# Altium PCB Driver_Board.PcbDoc (part 3 of 3)
Units mm, origin at the board's own origin, x right, y up, seen from the top; angles counter-clockwise.
Board outline 99.79 x 84.12 mm, 4 copper layers (Top Layer, Layer 1, Layer 2, Bottom Layer), stack 0.603 mm thick; 126 components, 86 nets, 479 pads, 531 vias.
Unrouted connection lines stored in the file: 62.
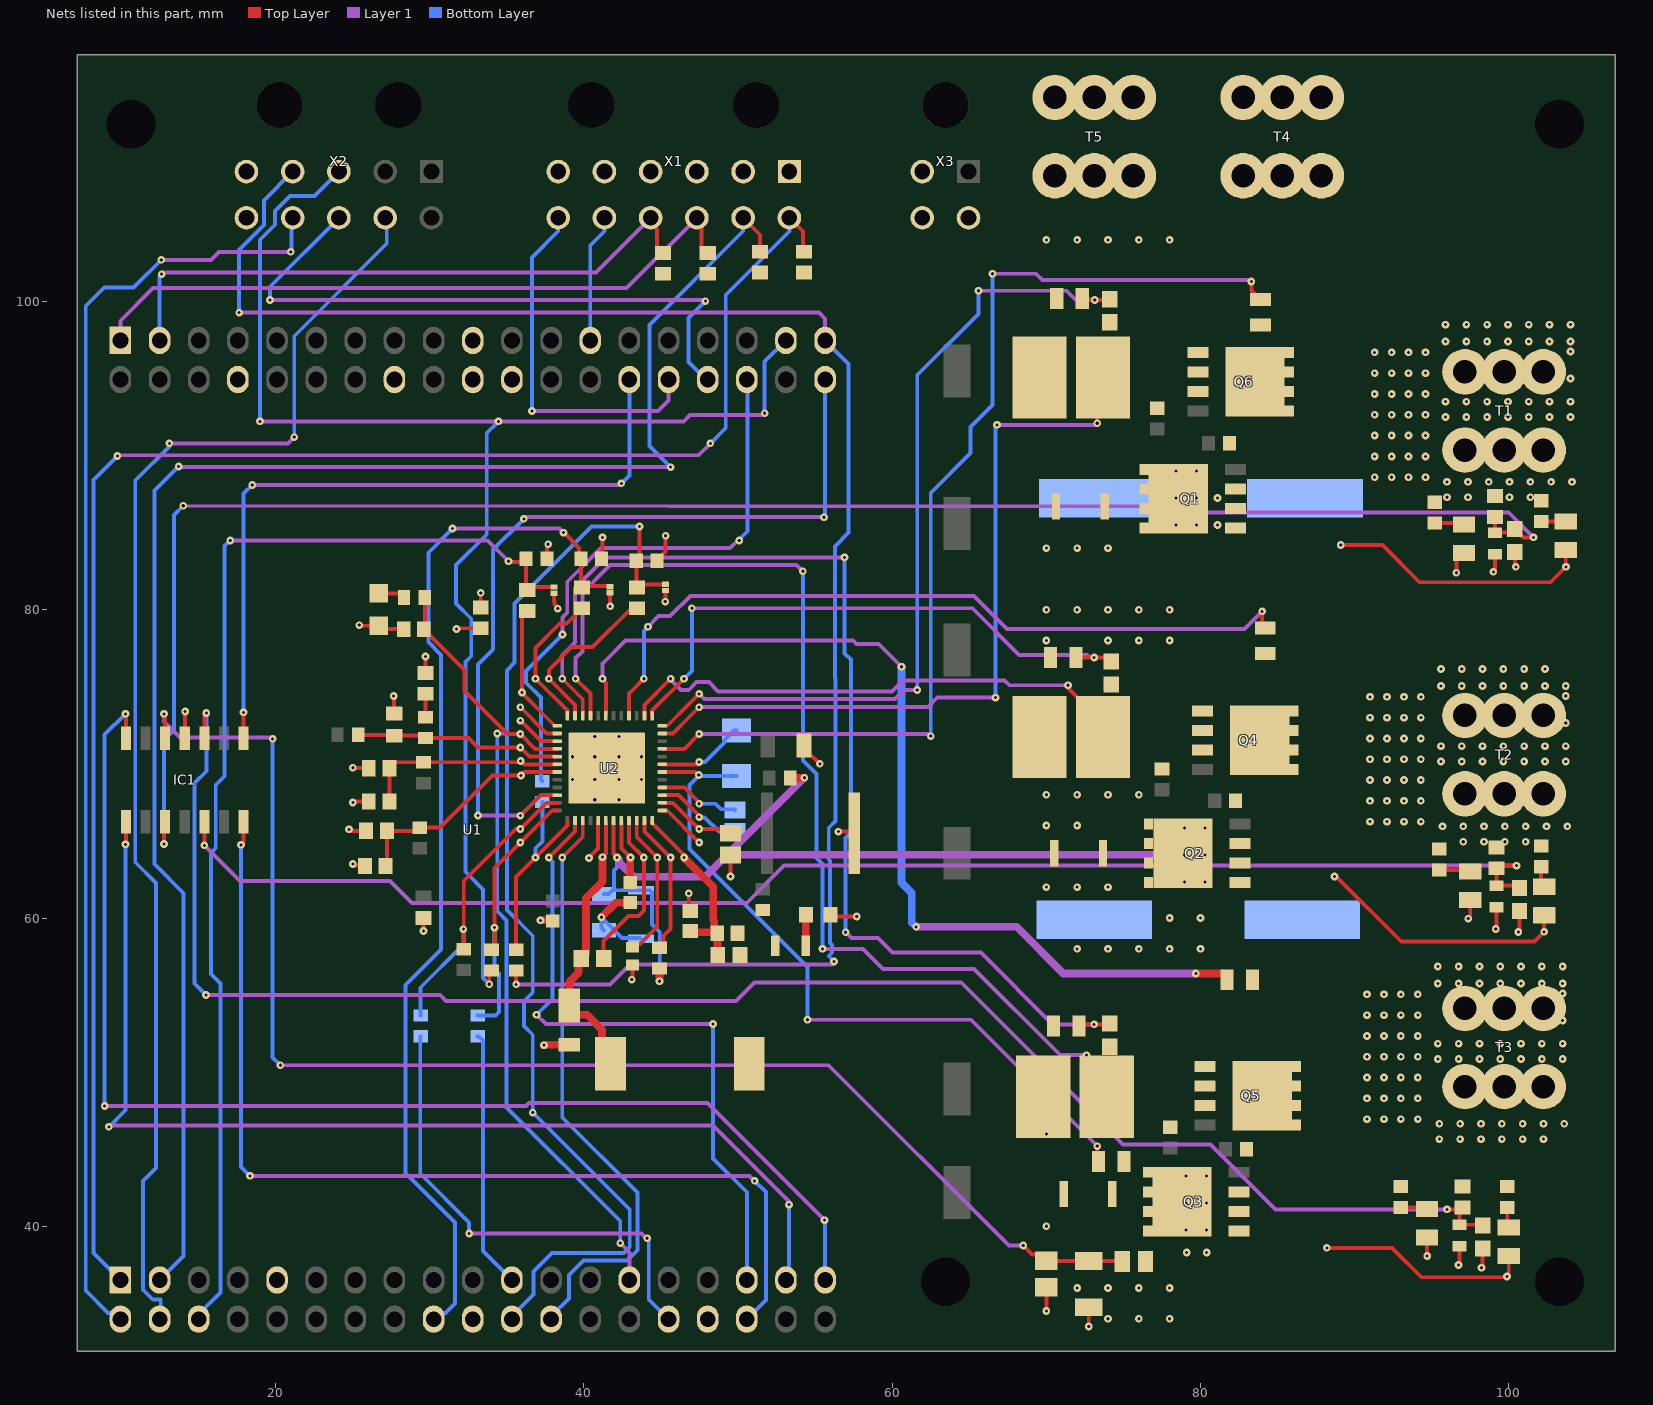
[diagram p4: the nets of this part, all layers, seen from the top]

## Via types
v1: diameter 0.5, hole 0.2, Top Layer to Bottom Layer, 531 vias

## Nets (pads, with @x,y where several pads share a name; then routed paths per layer and width w, separated by ;. In a path a pad name is that pad's centre, name@x,y a point inside that pad or via, vN(x,y) a via of type N, cw(c..) or ccw(c..) an arc to the next point about the centre after c; other vN are vias at no path point) (continued)
HALLB: R8.1 U1.18 X2.P$3 | length 97.3
  Top Layer w0.254: v1(33.852,55.703) 33.852,56.527 R8.1@33.925,56.6
  Layer 1 w0.254: v1(18.975,92.225) v1(34.45,92.225) 46.475,92.225 46.875,92.625 51.6,92.625 v1(51.725,92.75)
  Bottom Layer w0.254: v1(18.975,92.225) 18.975,104.006 19.947,104.978 19.947,105.878 20.918,106.85 22.519,106.85 X2.P$3@24.1,108.431 ; v1(33.852,55.703) 33.45,56.104 33.45,61.85 32.3,63 32.3,76.6 32.683,76.983 32.683,79.417 31.7,80.4 31.7,82.9 33.692,84.892 33.692,91.467 v1(34.45,92.225) ; v1(51.725,92.75) 51.725,96.095 U1.18@53.105,97.475
HALLC: R11.1 U1.19 X2.P$4 | length 114.2
  Top Layer w0.254: v1(35.6,55.7) R11.1@35.6,56.6
  Layer 1 w0.254: v1(17.625,99.275) 55.25,99.275 55.645,98.88 U1.19@55.645,97.475 ; v1(35.6,55.7) 41.7,55.7 42.975,56.975 56.1,56.975 56.225,57.1 v1(56.225,57.175)
  Bottom Layer w0.254: v1(17.625,99.275) 17.625,103.355 19.232,104.962 19.232,106.563 X2.P$4@21.1,108.431 ; U1.19@55.645,97.475 57.175,95.945 57.175,85 56.283,84.108 56.283,75.578 56.317,75.544 56.317,66.29 55.883,65.856 55.883,63.8 55.969,63.714 55.969,58.379 56.092,58.256 56.092,57.744 55.883,57.535 55.883,57.517 v1(56.225,57.175)
IDRIVE: R18.2 R31.2 R32.1 U2.30 | length 13.4
  Top Layer w0.254: R32.1@27.385,67.564 R31.2@27.385,69.723 27.385,69.781 27.708,70.104 R18.2@29.591,70.104 35.712,70.104 35.802,70.194 35.869,70.194 35.92,70.194 36.141,69.973 U2.30@38.271,69.973
  other v1: 35.894,70.194
INHA: U1.38 U2.34 | length 54.7
  Top Layer w0.254: v1(35.869,66.642) 37.2,67.973 U2.34@38.271,67.973
  Layer 1 w0.254: v1(33.125,66.65) 33.133,66.642 v1(35.869,66.642) ; v1(36.1,85.9) 36.217,86.017 55.558,86.017 v1(55.575,86)
  Bottom Layer w0.254: v1(33.125,66.65) 33.125,76.45 34.1,77.425 34.1,83.9 v1(36.1,85.9) ; v1(55.575,86) 55.622,86.047 55.622,86.221 55.645,86.244 U1.38@55.645,94.935
INHB: R7.1 R7.2 R8.2 U1.49 | length 34.8
  Top Layer w0.254: R8.2@34,57.95 34.2,58.15 v1(34.2,59.375) 34.2,63.233 v1(35.869,64.902) 37.94,66.973 38.271,66.973
  Bottom Layer w0.254: R7.1@33.1,52.325 33.175,52.325 33.448,52.052 33.448,38.392 U1.49@35.325,36.515 ; R7.2@33.1,53.675 34.25,53.675 34.489,53.914 34.489,56.392 34.2,56.681 v1(34.2,59.375)
INHC: U1.55 U2.38 | length 43
  Top Layer w0.254: v1(37.72,63.921) 39.421,65.622 U2.38@39.421,66.323
  Layer 1 w0.254: v1(36.925,53.725) 37.525,53.125 v1(48.375,53.125)
  Bottom Layer w0.254: v1(36.925,53.725) 37.95,54.75 37.95,63.649 37.72,63.879 v1(37.72,63.921) ; v1(48.375,53.125) 48.375,44.4 50.565,42.21 U1.55@50.565,36.515
INLA: R5.1 R5.2 R6.2 U1.72 | length 51
  Top Layer w0.254: R6.2@32.2,57.975 v1@32.2,59.275 ; v1@32.2,59.3 32.2,62.4 35.572,65.772 v1(35.869,65.772) 37.57,67.473 38.271,67.473
  Layer 1 w0.254: v1(32.55,39.525) 43.733,39.525 44.033,39.225 v1(44.1,39.225)
  Bottom Layer w0.254: R5.1@29.4,52.325 29.375,52.3 29.375,43.425 32.55,40.25 v1(32.55,39.525) ; R5.2@29.4,53.675 29.4,55.45 29.375,55.475 32.175,58.275 v1(32.175,59.275) ; v1(44.1,39.225) 44.2,39.125 44.2,35.25 45.475,33.975 U1.72@45.485,33.975
INLB: R10.1 R10.2 R11.2 U1.36 | length 51.2
  Top Layer w0.254: R11.2@35.6,57.95 35.6,62.671 v1(36.85,63.921) 38.921,65.992 38.921,66.323
  Layer 1 w0.254: v1(38.6,78.4) 38.6,79.502 38.917,79.819 38.917,81.817 41.1,84 49.475,84 49.975,84.5 v1(50.075,84.5)
  Bottom Layer w0.254: v1(36.85,63.921) 36.85,64.525 37.3,64.975 R10.1@37.3,67.525 ; R10.2@37.3,68.875 37.2,68.975 37.2,74.3 36.233,75.267 36.233,76.033 v1(38.6,78.4) ; v1(50.075,84.5) 50.075,84.567 50.6,85.092 50.6,94.463 50.346,94.716 U1.36@50.565,94.935
INLC: U1.69 U2.39 | length 38.9
  Top Layer w0.254: v1(38.59,63.921) 39.921,65.252 U2.39@39.921,66.323
  Bottom Layer w0.254: U1.69@37.865,33.975 37.865,34.165 39.024,35.324 39.024,36.831 39.964,37.771 42.792,37.771 43.463,38.442 43.463,42.187 38.59,47.06 v1(38.59,63.921)
ISENA: C12.2 D2.2 R24.1 U1.60 | length 75.4
  Top Layer w0.254: v1(35.1,83.15) 35.1,83.1 36.242,83.1 36.242,81.36 R24.1@36.322,81.28 36.517,81.475 D2.2@38.05,81.475
  Layer 1 w0.254: v1(17.05,84.5) 33.75,84.5 v1(35.1,83.15)
  Bottom Layer w0.254: U1.60@15.005,33.975 15.005,34.295 16.425,35.715 16.425,55.75 15.8,56.375 15.8,64.225 16.108,64.533 16.108,68.633 16.675,69.2 16.675,84.125 v1(17.05,84.5)
ISENB: C13.2 D3.2 R27.1 U1.66 | length 68.6
  Top Layer w0.254: v1(38.675,85) 38.7,85 39.681,84.019 39.681,83.429 C13.2@39.798,83.312 39.798,81.527 R27.1@39.878,81.447 39.979,81.548 41.627,81.548 D3.2@41.675,81.5
  Layer 1 w0.254: v1(31.475,85.275) 38.4,85.275 v1(38.675,85)
  Bottom Layer w0.254: U1.66@30.245,33.975 30.654,34.384 31.009,34.384 31.625,35 31.625,40.25 28.425,43.45 28.425,55.65 30.725,57.95 30.725,77.075 29.9,77.9 29.9,83.7 v1(31.475,85.275)
ISENC: C14.2 D4.2 R28.1 U1.68 | length 72.6
  Top Layer w0.254: v1(43.6,85.4) 43.6,83.591 43.7,83.491 C14.2@43.394,83.185 43.394,81.487 R28.1@43.434,81.447 43.637,81.65 D4.2@45.3,81.65
  Bottom Layer w0.254: U1.68@35.325,33.975 35.325,34.165 36.731,35.571 36.731,37.078 37.918,38.265 42.588,38.265 42.969,38.646 42.969,41.081 v1(36.675,47.375) 36.675,52.425 36.1,53 36.1,54.6 36.675,55.175 36.675,58.85 34.992,60.533 34.992,76.067 35.5,76.575 35.5,80.4 40.5,85.4 v1(43.6,85.4)
MODE: R17.1 R21.2 | length 1.5
  Top Layer w0.254: R17.1@29.718,73.025 R21.2@29.718,74.549
MOTA: C21.1 C23.1 C27.2 Q1.1 Q1.2 Q1.3 Q6.5 Q6.6 Q6.7 Q6.8 Q6.9 R40.2 R43.2 T1.1 T1.2 T1.3 T1.4 T1.5 T1.6 | length 0.3
  Top Layer w0.254: T1.2@99.314,95.885 T1.2@99.314,96.215
  other v1: 96,87.3 97.35,87.3 100.05,87.3 100.05,87.3 101.4,87.3 96,88.3 97.35,88.3 98.7,88.3 100.05,88.3 100.05,88.3 101.4,88.3 102.75,88.3 104.1,88.3 91.3,88.6 92.4,88.6 93.5,88.6 94.6,88.6 91.3,89.95 92.4,89.95 93.5,89.95 94.6,89.95 91.3,91.3 92.4,91.3 93.5,91.3 94.6,91.3 95.9,92.5 97.25,92.5 98.6,92.5 99.95,92.5 99.95,92.5 101.3,92.5 102.65,92.5 104,92.5 91.3,92.65 91.3,92.65 92.4,92.65 92.4,92.65 93.5,92.65 93.5,92.65 94.6,92.65 94.6,92.65 95.9,93.5 97.25,93.5 98.6,93.5 99.95,93.5 99.95,93.5 101.3,93.5 102.65,93.5 104,93.5 91.3,94 92.4,94 93.5,94 94.6,94 104,95 91.3,95.35 92.4,95.35 93.5,95.35 94.6,95.35 91.3,96.7 92.4,96.7 93.5,96.7 94.6,96.7 104,96.75 95.9,97.4 97.25,97.4 98.6,97.4 99.95,97.4 99.95,97.4 101.3,97.4 102.65,97.4 104,97.4 95.9,98.5 97.25,98.5 98.6,98.5 99.95,98.5 99.95,98.5 101.3,98.5 102.65,98.5 104,98.5
MOTB: C24.1 C25.1 C28.2 Q2.1 Q2.2 Q2.3 Q4.5 Q4.6 Q4.7 Q4.8 Q4.9 R41.2 R44.2 T2.1 T2.2 T2.3 T2.4 T2.5 T2.6
  other v1: 97.05,64.95 98.4,64.95 99.75,64.95 101.1,64.95 95.7,65.95 97.05,65.95 98.4,65.95 99.75,65.95 99.75,65.95 101.1,65.95 102.45,65.95 103.8,65.95 91,66.25 92.1,66.25 93.2,66.25 94.3,66.25 91,67.6 92.1,67.6 93.2,67.6 94.3,67.6 91,68.95 92.1,68.95 93.2,68.95 94.3,68.95 95.6,70.15 96.95,70.15 98.3,70.15 99.65,70.15 99.65,70.15 101,70.15 102.35,70.15 103.7,70.15 91,70.3 91,70.3 92.1,70.3 92.1,70.3 93.2,70.3 93.2,70.3 94.3,70.3 94.3,70.3 95.6,71.15 96.95,71.15 98.3,71.15 99.65,71.15 99.65,71.15 101,71.15 102.35,71.15 103.7,71.15 91,71.65 92.1,71.65 93.2,71.65 94.3,71.65 103.7,72.65 91,73 92.1,73 93.2,73 94.3,73 91,74.35 92.1,74.35 93.2,74.35 94.3,74.35 103.7,74.4 95.6,75.05 96.95,75.05 98.3,75.05 99.65,75.05 99.65,75.05 101,75.05 102.35,75.05 103.7,75.05 95.6,76.15 96.95,76.15 98.3,76.15 99.65,76.15 99.65,76.15 101,76.15 102.35,76.15
MOTC: C22.1 C26.1 C29.2 Q3.1 Q3.2 Q3.3 Q5.5 Q5.6 Q5.7 Q5.8 Q5.9 R42.2 R45.2 T3.1 T3.2 T3.3 T3.4 T3.5 T3.6
  other v1: 95.5,45.65 96.85,45.65 98.2,45.65 99.55,45.65 99.55,45.65 100.9,45.65 102.25,45.65 95.5,46.65 96.85,46.65 98.2,46.65 99.55,46.65 99.55,46.65 100.9,46.65 102.25,46.65 103.6,46.65 90.8,46.95 91.9,46.95 93,46.95 94.1,46.95 90.8,48.3 91.9,48.3 93,48.3 94.1,48.3 90.8,49.65 91.9,49.65 93,49.65 94.1,49.65 95.4,50.85 96.75,50.85 98.1,50.85 99.45,50.85 99.45,50.85 100.8,50.85 102.15,50.85 103.5,50.85 90.8,51 90.8,51 91.9,51 91.9,51 93,51 93,51 94.1,51 94.1,51 95.4,51.85 96.75,51.85 98.1,51.85 99.45,51.85 99.45,51.85 100.8,51.85 102.15,51.85 103.5,51.85 90.8,52.35 91.9,52.35 93,52.35 94.1,52.35 103.5,53.35 90.8,53.7 91.9,53.7 93,53.7 94.1,53.7 90.8,55.05 91.9,55.05 93,55.05 94.1,55.05 103.5,55.1 95.4,55.75 96.75,55.75 98.1,55.75 99.45,55.75 99.45,55.75 100.8,55.75 102.15,55.75 103.5,55.75 95.4,56.85 96.75,56.85 98.1,56.85 99.45,56.85 99.45,56.85 100.8,56.85 102.15,56.85 103.5,56.85
NetC1_1: C1.1 U2.7 | length 5.9
  Top Layer w0.254: U2.7@45.071,69.973 47.357,69.973 47.5,70.116 v1@47.5,70.1
  Bottom Layer w0.254: v1(47.475,70.125) 47.85,70.125 49.077,71.352 49.077,71.527 49.725,72.175 C1.1@49.9,72.175
NetC4_1: C4.1 U2.3 | length 5.7
  Top Layer w0.254: U2.3@45.071,67.973 46.142,67.973 v1@47.473,66.642
  Bottom Layer w0.254: v1(47.473,66.542) 47.498,66.517 47.833,66.517 48.75,65.6 C4.1@49.8,65.6
NetC4_2: C4.2 U2.4 | length 5.3
  Top Layer w0.254: U2.4@45.071,68.473 46.512,68.473 v1@47.473,67.512
  Bottom Layer w0.254: v1(47.473,67.412) 48.538,67.412 48.893,67.057 49.743,67.057 C4.2@49.8,67
NetC6_1: C6.1 U2.45 | length 10.8
  Top Layer w0.254: C6.1@41.275,57.375 41.275,58.5 42.9,60.125 43.525,60.125 43.882,60.482 43.882,63.924 42.921,64.885 U2.45@42.921,66.323
  other v1: 43.882,63.921
NetC6_2: C6.2 D1.2 L1.1 U2.42 | length 18.3
  Top Layer w0.254: v1@41.2,63.921 41.2,63.972 41.421,64.193 U2.42@41.421,66.323
  Top Layer w0.5: v1@41.2,63.921 41.2,62.35 40.125,61.275 40.125,57.675 C6.2@39.825,57.375 39.645,57.195 39.645,56.445 39.082,55.882 39.082,54.357 D1.2@39.05,54.325 39.05,54.168 39.5,53.718 40.207,53.718 41.172,52.753 41.172,51.102 L1.1@41.728,50.546
  other v1: 41.2,63.946
NetC8_1: C8.1 R25.2 | length 2
  Top Layer w0.5: C8.1@54.375,58.2 54.387,58.212 54.387,60.187 R25.2@54.4,60.2
NetC9_1: C9.1 R30.1 R33.2 U2.48 | length 12
  Top Layer w0.254: U2.48@44.421,66.323 44.421,66.157 v1@46.453,64.125
  Top Layer w0.5: v1@46.492,63.921 48.387,62.026 48.387,59.887 48.45,59.824 48.45,59.2 R30.1@48.575,59.075 ; R33.2@46.9,59.15 46.975,59.075 R30.1@48.575,59.075 ; C9.1@48.675,57.6 48.663,57.612 48.663,58.987 R30.1@48.65,59 R30.1@48.575,59.075
  other v1: 46.5,63.925
NetC15_2: C15.2 U2.2 | length 5.2
  Top Layer w0.254: U2.2@45.071,67.473 45.772,67.473 v1(47.473,65.772) 49.228,65.772 C15.2@49.5,65.5
NetC16_2: C16.2 U2.44 | length 4.3
  Top Layer w0.254: U2.44@42.421,66.323 42.421,64.515 43.012,63.924 v1(43.012,63.921)
  Top Layer w0.5: C16.2@43,62.3 43,63.909 v1(43.012,63.921)
NetC17_2: C17.2 IC1.12 R34.1 R36.2 | length 90.9
  Top Layer w0.254: v1(12.75,73.25) 12.827,73.173 IC1.12@12.827,71.673 ; v1(68.5,38.75) 69.072,38.178 69.572,38.178 R36.2@70,37.75 C17.2@72.75,37.75 74.899,37.75 R34.1@74.93,37.719
  Layer 1 w0.254: v1(12.75,73.25) 12.75,72.75 13.8,71.7 19.725,71.7 v1(19.8,71.625) ; v1(20.3,50.45) 55.877,50.45 67.577,38.75 v1(68.5,38.75)
  Bottom Layer w0.254: v1(19.8,71.625) 19.8,50.95 v1(20.3,50.45)
NetC23_2: C23.2 R37.1 | length 1.6
  Top Layer w0.254: C23.2@102.1,85.725 R37.1@103.7,85.725
NetC25_2: C25.2 R38.1 | length 1.4
  Top Layer w0.254: C25.2@102.1,63.325 102.1,62.225 R38.1@102.3,62.025
NetC26_2: C26.2 R39.1 | length 1.3
  Top Layer w0.254: C26.2@99.9,41.225 99.9,40.025 R39.1@100,39.925
NetC27_1: C27.1 R46.2 | length 1.9
  Top Layer w0.254: C27.1@95.2,85.625 97,85.625 R46.2@97.1,85.525
NetC28_1: C28.1 R47.2 | length 2
  Top Layer w0.254: C28.1@95.5,63.125 97.4,63.125 R47.2@97.5,63.025
NetC29_1: C29.1 R48.2 | length 1.7
  Top Layer w0.254: C29.1@93,41.225 94.6,41.225 R48.2@94.7,41.125
NetDS1_2: DS1.2 R15.2 | length 1.8
  Top Layer w0.254: DS1.2@26.67,81.06 28.065,81.06 R15.2@28.325,80.8
NetIC1_1: IC1.1 U1.56 | length 71.7
  Top Layer w0.254: v1@10.251,64.751 v1(10.251,64.778) 10.287,64.815 IC1.1@10.287,66.249
  Layer 1 w0.254: v1(9.175,46.45) 9.256,46.531 48.366,46.531 53.3,41.598 v1(53.3,41.4)
  Bottom Layer w0.254: v1(9.175,46.45) 10.251,47.526 v1(10.251,64.778) ; U1.56@53.105,36.515 53.3,36.71 v1(53.3,41.4)
NetIC1_7: IC1.7 U1.74 | length 65.9
  Top Layer w0.254: v1(17.75,64.75) 17.907,64.907 IC1.7@17.907,66.249
  Layer 1 w0.254: v1(18.325,43.275) 50.75,43.275 v1(51.075,42.95)
  Bottom Layer w0.254: v1(17.75,64.75) 17.75,43.85 v1(18.325,43.275) ; U1.74@50.565,33.975 51.8,35.21 51.8,42.225 v1(51.075,42.95)
NetIC1_8: IC1.8 U1.33 | length 47.6
  Top Layer w0.254: IC1.8@17.907,71.673 v1(17.907,73.343)
  Layer 1 w0.254: v1(18.475,88.1) 42.325,88.1 v1(42.425,88.2)
  Bottom Layer w0.254: v1(17.907,73.343) 17.907,87.532 v1(18.475,88.1) ; v1(42.425,88.2) 42.945,88.72 U1.33@42.945,94.935
NetIC1_14: IC1.14 U1.57 | length 81.4
  Top Layer w0.254: v1(10.25,73.25) 10.287,73.213 IC1.14@10.287,71.673
  Layer 1 w0.254: v1(8.9,47.8) 36.227,47.8 36.419,47.992 48.008,47.992 v1(55.6,40.4)
  Bottom Layer w0.254: v1(8.9,47.8) 8.9,71.9 v1(10.25,73.25) ; v1(55.6,40.4) 55.645,40.355 U1.57@55.645,36.515
NetR1_1: R1.1 U1.2 X1.P$10 | length 40.4
  Top Layer w0.254: X1.P$10@44.325,105.431 44.325,105.086 44.727,104.684 44.727,103.473 45.05,103.15 R1.1@45.125,103.15 R1.1@45.2,103.225
  Layer 1 w0.254: v1(12.6,101.775) 12.7,101.875 40.769,101.875 X1.P$10@44.325,105.431
  Bottom Layer w0.254: U1.2@12.465,97.475 12.465,101.64 v1(12.6,101.775)
NetR2_1: R2.1 U1.1 X1.P$9 | length 44.3
  Top Layer w0.254: X1.P$9@47.325,105.431 47.325,105.086 47.627,104.784 47.627,103.473 47.95,103.15 R2.1@48.025,103.15 ; R2.1@48.05,103.275 R2.1@48.2,103.425
  Layer 1 w0.254: U1.1@9.925,97.475 9.925,98.75 12.05,100.875 42.769,100.875 X1.P$9@47.325,105.431
NetR3_1: R3.1 U1.40 X1.P$8 | length 109.1
  Top Layer w0.254: X1.P$8@50.325,105.431 51.425,104.331 R3.1@51.425,103.225 R3.1@51.2,103.45
  Layer 1 w0.254: v1(13.7,89.3) 13.725,89.275 45.6,89.275 v1(45.625,89.25)
  Bottom Layer w0.254: U1.40@12.465,36.515 14.025,38.075 14.025,61.605 12.133,63.497 12.133,87.733 v1(13.7,89.3) ; v1(45.625,89.25) 44.25,90.625 44.25,98.481 50.325,104.556 X1.P$8@50.325,105.431
NetR4_1: R4.1 U1.39 X1.P$7 | length 113
  Top Layer w0.254: X1.P$7@53.325,105.431 54.2,104.556 54.2,103.3 R4.1@54.275,103.225
  Layer 1 w0.254: v1(9.725,89.975) 9.775,90.025 47.425,90.025 v1(48.2,90.8)
  Bottom Layer w0.254: v1(9.725,89.975) 8.175,88.425 8.175,38.265 U1.39@9.925,36.515 ; v1(48.2,90.8) 49.2,91.8 49.2,100.431 53.325,104.556 X1.P$7@53.325,105.431
NetR14_1: R14.1 R16.2 R17.2 U2.29 | length 13.5
  Top Layer w0.254: R16.2@25.353,71.882 27.633,71.882 R14.1@27.686,71.829 29.564,71.829 R17.2@29.718,71.675 32.5,71.675 33.111,71.064 v1(35.869,71.064) 36.46,70.473 U2.29@38.271,70.473
NetR26_1: R26.1 U2.46 | length 9.6
  Top Layer w0.254: R26.1@43.15,58.1 43.225,58.1 43.448,58.323 43.623,58.323 44.752,59.452 44.752,63.924 43.421,65.255 U2.46@43.421,66.323
  other v1: 44.752,63.921
NetR29_1: R29.1 U2.47 | length 9.4
  Top Layer w0.254: U2.47@43.921,66.323 43.927,66.317 43.927,65.619 45.622,63.924 v1(45.622,63.921) 45.6,63.899 45.6,59.3 45.148,58.848 R29.1@45.148,57.848
NetU1_13: U1.13 X1.P$11 | length 8.9
  Bottom Layer w0.254: U1.13@39.996,97.884 U1.13@40.405,97.475 40.405,103.636 41.325,104.556 X1.P$11@41.325,105.431
NetU1_34: U1.34 X1.P$12 | length 23.7
  Layer 1 w0.254: v1(36.625,92.9) 44.8,92.9 45.485,93.585 U1.34@45.485,94.935
  Bottom Layer w0.254: v1(36.625,92.9) 36.625,102.856 38.325,104.556 X1.P$12@38.325,105.431
NetU1_35: U1.35 X2.P$8 | length 41.6
  Layer 1 w0.254: v1(19.625,100.1) 47.8,100.1 v1(47.875,100.025)
  Bottom Layer w0.254: v1(19.625,100.1) 19.625,100.956 X2.P$8@24.1,105.431 ; v1(47.875,100.025) 46.775,98.925 46.775,96.075 47.915,94.935 U1.35@48.025,94.935
NetU1_58: U1.58 X2.P$9 | length 83.9
  Layer 1 w0.254: v1(12.575,102.7) 15.8,102.7 16.325,103.225 v1(20.975,103.225)
  Bottom Layer w0.254: U1.58@9.925,33.975 9.52,34.38 9.12,34.38 7.675,35.825 7.675,99.7 8.875,100.9 10.775,100.9 v1(12.575,102.7) ; v1(20.975,103.225) 21.022,103.272 21.022,105.353 X2.P$9@21.1,105.431
NetU1_59: U1.59 X2.P$7 | length 84.5
  Layer 1 w0.254: v1(13.1,90.8) 20.8,90.8 v1(21.2,91.2)
  Bottom Layer w0.254: U1.59@12.465,33.975 12.539,34.049 12.539,35.259 12.024,35.259 11.399,35.883 11.399,42.937 12.23,43.767 12.23,62.271 10.883,63.617 10.883,88.383 13.1,90.6 v1(13.1,90.8) ; v1(21.2,91.2) 21.2,97.747 27.205,103.752 27.205,105.326 X2.P$7@27.1,105.431
nFault: R13.1 R15.1 U1.52 U2.28 | length 55.3
  Top Layer w0.254: R15.1@29.675,80.8 29.675,78.809 R13.1@29.606,78.74 29.606,78.69 29.929,78.367 29.979,78.367 32.25,76.096 32.25,74.725 35.041,71.934 v1(35.869,71.934) 36.83,70.973 U2.28@38.271,70.973
  Layer 1 w0.254: v1(34.375,71.975) 34.395,71.955 35.849,71.955 v1(35.869,71.934) ; v1(42.352,38.902) 42.945,38.309 U1.52@42.945,36.515
  Bottom Layer w0.254: v1(34.375,71.975) 34.375,60.451 34.983,59.843 34.983,47.717 42.352,40.348 v1(42.352,38.902)
PGND: C2.1 C3.1 C5.1 C7.1 C10.1 C11.1 C12.1 C13.1 C14.1 C15.1 C16.1 C17.1 C18.1 C19.1 C20.1 C33.1 C34.1 C35.1 C39.2 C40.2 D1.1 D2.1 D3.1 D4.1 IC1.11 R20.1 R21.1 R23.2 R25.1 R26.2 R32.2 R33.1 R36.1 R46.1 R47.1 R48.1 R49.2 R50.2 R51.2 R52.2 R53.2 R54.2 R55.2 R56.2 R57.2 T5.1 T5.2 T5.3 T5.4 T5.5 T5.6 U1.10 U1.23 U1.29 U1.30 U1.43 U1.67 U1.73 U2.1 U2.27 U2.41 U2.49@41.483,69.723 X1.P$1 X1.P$2 X1.P$3 X1.P$4 X1.P$5 X2.P$5 X2.P$10 X3.P$3 X3.P$4 | length 54.8
  Top Layer w0.254: IC1.11@14.097,71.673 14.049,71.721 14.125,71.798 v1(14.125,73.4) ; v1(25,63.5) 25.099,63.401 25.753,63.401 R23.2@25.781,63.373 ; v1(25,67.5) 25.064,67.564 R32.2@26.035,67.564 ; v1@29.575,59.175 v1(29.591,59.159) R20.1@29.591,59.991 ; R21.1@29.718,75.899 v1(29.718,76.968) v1@29.75,77 ; v1(31.725,78.75) 31.775,78.8 C7.1@33.3,78.8 ; v1(35.869,72.804) 37.2,71.473 U2.27@38.271,71.473 ; C12.1@37.592,83.312 37.592,84.167 v1(37.675,84.25) ; D2.1@38.05,81.075 38.05,80.55 38.075,80.55 38.075,80.367 38.3,80.142 v1(38.3,80.075) ; v1@40.33,63.921 40.921,64.512 U2.41@40.921,66.323 ; C13.1@41.148,83.312 41.2,83.364 v1(41.2,84.7) 41.2,84.237 41.194,84.231 ; D3.1@41.675,81.1 41.675,80.25 v1(41.7,80.225) ; v1(43.1,56) 43.15,56.05 R26.2@43.15,56.95 ; C14.1@44.744,83.185 44.9,83.341 44.875,83.366 45.3,83.791 v1(45.3,84.8) ; U2.1@45.071,66.973 45.402,66.973 v1(47.473,64.902) ; v1(45.275,80.525) 45.275,80.55 45.3,80.575 D4.1@45.3,81.25 ; v1(46.8,61.6) 46.8,60.55 R33.1@46.9,60.45 ; v1(49.5,62.7) 49.5,63.9 49.6,64 C15.1@49.5,64.1 ; C3.1@54.515,71.247 54.515,70.785 v1(55.3,70) ; R25.1@56,60.2 56.1,60.1 v1(57.7,60.1) ; v1(56.5,65.6) 57.425,65.6 C2.1@57.525,65.5 ; v1(70,34.5) R36.1@70,36.05 ; v1(72.75,33.5) C17.1@72.75,34.75 ; R48.1@94.7,39.275 94.7,38.075 v1(94.707,38.068) ; v1(96.6,82.4) 96.6,83.277 96.998,83.675 R46.1@97.1,83.675 ; v1(96.738,37.489) 96.8,37.489 R51.2@96.8,38.7 ; v1(97.372,59.957) 97.5,60.085 R47.1@97.5,61.175 ; v1(98.235,37.307) 98.3,37.372 C35.1@98.3,38.55 ; v1(99.002,82.46) 99.1,82.558 R49.2@99.1,83.6 ; v1(99.159,59.289) 99.2,59.33 R50.2@99.2,60.7 ; C33.1@100.4,83.75 100.4,82.845 v1(100.458,82.787) ; v1(100.623,59.089) 100.7,59.166 C34.1@100.7,60.45
  Top Layer w0.5: v1(37.175,59.85) 37.925,59.85 C5.1@37.975,59.8 ; v1(37.4,51.75) 37.425,51.775 D1.1@39.05,51.775 ; v1(41.125,60.05) 42.075,61 C16.1@43,61
  Bottom Layer w0.254: C10.1@41.287,59.198 41.125,59.36 v1(41.125,60.05) 42.469,58.706 43.646,58.706 C11.1@43.7,58.652
  other v1: 74,34 76,34 78,34 72,36 74,36 76,36 78,36 70,40 70,46 72,58 74,58 76,58 78,58 80,58 78,60 80,60 70,62 72,62 74,62 40.325,63.9 70,66 72,66 40.698,67.673 42.268,67.673 70,68 72,68 74,68 76,68 39.245,68.983 40.698,68.983 42.268,68.983 43.721,68.983 39.245,70.463 40.698,70.463 42.268,70.463 43.721,70.463 40.698,71.773 42.268,71.773 70,78 74,78 76,78 78,78 70,80 72,80 74,80 76,80 78,80 70,84 72,84 74,84 70,104 72,104 74,104 76,104 78,104
SHA: R40.1 U2.9 | length 68
  Top Layer w0.254: U2.9@45.071,70.973 46.512,70.973 v1(47.473,71.934) ; v1(83.3,101.3) 83.3,100.725 R40.1@83.9,100.125
  Layer 1 w0.254: v1(47.473,71.934) 62.366,71.934 v1(62.5,71.8) ; v1(66.5,101.8) 69.328,101.8 69.744,101.383 83.217,101.383 v1(83.3,101.3)
  Bottom Layer w0.254: v1(62.5,71.8) 62.5,87.576 65.083,90.159 65.083,91.856 66.5,93.273 v1(66.5,101.8)
SHB: R41.1 U2.16 | length 49.5
  Top Layer w0.254: U2.16@42.921,73.123 42.921,74.564 43.265,74.908 43.268,74.908 43.629,75.269 43.629,75.272 v1(43.882,75.525) ; v1(84,79.9) 84,79.285 84.2,79.085 R41.1@84.2,78.825
  Layer 1 w0.254: v1(44.15,78.9) 44.842,79.592 45.592,79.592 46.9,80.9 65.3,80.9 67.45,78.75 82.85,78.75 v1(84,79.9)
  Bottom Layer w0.254: v1(43.882,75.525) 43.882,78.632 v1(44.15,78.9)
SHC: R42.1 U2.19 | length 63.2
  Top Layer w0.254: v1(41.2,75.525) 41.2,75.474 41.421,75.253 U2.19@41.421,73.123
  Top Layer w0.5: v1(79.7,56.4) 81.55,56.4 81.725,56.225 R42.1@81.725,56
  Layer 1 w0.254: v1(41.2,75.525) 41.2,76.5 42.693,77.993 57.473,77.993 57.691,77.775 59.125,77.775 v1(60.6,76.3)
  Layer 1 w0.5: v1(61.55,59.425) 68.075,59.425 71.1,56.4 v1(79.7,56.4)
  Bottom Layer w0.5: v1(60.6,76.3) 60.6,62.3 61.275,61.625 61.275,59.7 v1(61.55,59.425)
SNA: C36.1 R55.1 U2.12 | length 54.8
  Top Layer w0.254: U2.12@45.071,72.473 45.402,72.473 46.856,73.927 46.856,73.93 47.47,74.544 v1(47.473,74.544) ; R55.1@72.325,100.2 72.525,100 72.65,100.125 72.675,100.1 v1(73.138,100.1) 74.05,100.1 C36.1@74.1,100.15
  Layer 1 w0.254: v1(47.473,74.544) 47.485,74.544 47.815,74.214 60.185,74.214 60.771,74.8 v1(61.625,74.8) ; v1(65.6,100.7) 71.3,100.7 71.875,100.125 72.875,100.125
  Bottom Layer w0.254: v1(61.625,74.8) 61.625,95.225 65.6,99.2 v1(65.6,100.7)
SNB: C37.1 R56.1 U2.13 | length 37.8
  Top Layer w0.254: U2.13@44.421,73.123 44.421,73.454 v1(46.492,75.525) ; R56.1@71.925,76.9 v1(73.1,76.9) 73.95,76.9 C37.1@74.2,76.65
  Layer 1 w0.254: v1(47,80.1) 65.2,80.1 68.225,77.075 72.638,77.075 72.788,76.925 73.075,76.925 v1(73.1,76.9)
  Bottom Layer w0.254: v1(46.492,75.525) 47,76.033 v1(47,80.1)
SNC: C38.1 R57.1 U2.22 | length 72.8
  Top Layer w0.254: v1(38.59,75.525) 39.921,74.194 U2.22@39.921,73.123 ; R57.1@72.125,53 72.225,53.1 v1(73.1,53.1) 74.05,53.1 C38.1@74.1,53.15
  Layer 1 w0.254: v1(38.59,75.525) 38.59,77.065 39.411,77.886 39.411,81.411 41.4,83.4 v1(56.9,83.4) ; v1(56.975,59.075) 57.35,58.7 59.075,58.7 60.025,57.75 65.75,57.75 70.4,53.1 v1(73.1,53.1)
  Bottom Layer w0.254: v1(56.9,83.4) 56.9,77.171 57.311,76.76 57.311,65.538 56.975,65.202 v1(56.975,59.075)
SOA: R24.2 U2.25 | length 8.6
  Top Layer w0.254: R24.2@36.322,79.93 35.977,79.585 v1(35.977,74.629) 35.977,74.601 38.105,72.473 U2.25@38.271,72.473
SOB: R27.2 U2.24 | length 9.4
  Top Layer w0.254: U2.24@38.921,73.123 38.921,73.454 v1(36.85,75.525) 36.85,77.523 38.428,79.101 38.882,79.101 39.48,79.699 39.48,79.774 39.803,80.097 R27.2@39.878,80.097
SOC: R28.2 U2.23 | length 11
  Top Layer w0.254: U2.23@39.421,73.123 39.421,73.824 v1(37.72,75.525) 37.72,76.095 39.2,77.575 40.55,77.575 43.072,80.097 R28.2@43.434,80.097
SPA: C30.1 C36.2 Q6.1 Q6.2 Q6.3 R52.1 U2.11 | length 51
  Top Layer w0.254: U2.11@45.071,71.973 45.772,71.973 46.856,73.057 46.856,73.06 47.217,73.421 47.22,73.421 v1(47.473,73.674) ; v1(73.3,92.1) 73.3,94.705 R52.1@73.67,95.075 R52.1@73.67,94.165 ; Q6.2@79.864,95.539 Q6.2@79.9,95.575
  Layer 1 w0.254: v1(47.473,73.674) 47.499,73.7 62.323,73.7 62.923,74.3 v1(66.7,74.3) ; v1(66.8,92) 73.133,92 73.233,92.1 v1(73.3,92.1)
  Bottom Layer w0.254: v1(66.7,74.3) 66.7,91.9 v1(66.8,92)
SPB: C31.1 C37.2 Q4.1 Q4.2 Q4.3 R53.1 U2.14 | length 34.4
  Top Layer w0.254: U2.14@43.921,73.123 43.921,73.824 v1(45.622,75.525) ; v1(71.4,75.1) 71.447,75.053 71.447,74.883 73.67,72.66 R53.1@73.67,71.75
  Layer 1 w0.254: v1(45.622,75.525) 45.622,75.478 46.3,74.8 46.8,74.8 47.3,75.3 48.1,75.3 48.692,74.708 59.981,74.708 60.69,75.417 67.283,75.417 67.6,75.1 v1(71.4,75.1)
SPC: C32.1 C38.2 Q5.1 Q5.2 Q5.3 R54.1 U2.21 | length 72
  Top Layer w0.254: v1(39.46,75.525) 40.421,74.564 U2.21@40.421,73.123 ; v1(72.6,51.1) 72.6,49.72 R54.1@73.92,48.4
  Layer 1 w0.254: v1(39.46,75.525) 39.46,76.86 39.905,77.305 39.905,81.105 41.7,82.9 53.8,82.9 v1(54.2,82.5) ; v1(55.475,58) 58.1,58 59.4,56.7 65.3,56.7 70.9,51.1 v1(72.6,51.1)
  Bottom Layer w0.254: v1(54.2,82.5) 54.2,70.227 55.083,69.344 55.083,63.902 55.475,63.51 v1(55.475,58)
VBUCK: C8.2 C9.2 L1.2 R12.1 R30.2 | length 1
  Top Layer w0.5: R30.2@49.95,59 R30.2@50.036,58.914 ; L1.2@50.197,51.077 L1.2@50.728,50.546 ; C8.2@52.4,58.073 52.425,58.098 C8.2@52.425,58.2
VDRAIN: C1.2 R35.1 U2.6 | length 47.5
  Top Layer w0.254: U2.6@45.071,69.473 47.201,69.473 47.422,69.252 v1@47.473,69.252 ; v1(73.3,45.2) 73.3,44.275 R35.1@73.375,44.2
  Layer 1 w0.254: v1(54.5,53.4) 65.1,53.4 v1(73.3,45.2)
  Bottom Layer w0.254: v1(47.448,69.277) 47.515,69.277 47.567,69.225 C1.2@49.9,69.225 ; v1@47.473,69.252 47.47,69.252 46.856,68.638 46.856,64.471 54.5,56.827 v1(54.5,53.4)
VDS: R19.2 R22.2 R23.1 U2.31 | length 15
  Top Layer w0.254: R23.1@27.131,63.373 27.218,63.46 R22.2@27.218,65.659 29.13,65.659 R19.2@29.337,65.866 30.666,65.866 34.052,69.252 v1(35.92,69.252) 36.141,69.473 U2.31@38.271,69.473
VM: C10.2 C11.2 C18.2 C19.2 C20.2 C39.1 C40.1 Q1.5 Q1.6 Q1.7 Q1.8 Q1.9 Q2.5 Q2.6 Q2.7 Q2.8 Q2.9 Q3.5 Q3.6 Q3.7 Q3.8 Q3.9 R9.1 R29.2 R34.2 R35.2 R37.2 R38.2 R39.2 T4.1 T4.2 T4.3 T4.4 T4.5 T4.6 U2.43 | length 109.2
  Top Layer w0.254: U2.43@41.921,66.323 41.921,64.193 42.142,63.972 v1(42.142,63.921) ; R34.2@76.43,37.719 76.5,37.789 R34.2@76.5,37.964 ; v1(88.2,38.6) 92.424,38.6 94.334,36.69 99.765,36.69 99.82,36.745 v1(99.887,36.745) 100,36.858 R39.2@100,38.075 ; v1(88.7,62.7) 88.8,62.7 93.028,58.472 101.672,58.472 v1(102.3,59.1) R38.2@102.3,60.175 ; v1(89.1,84.2) 91.803,84.2 94.22,81.783 102.708,81.783 103.7,82.775 R37.2@103.7,83.875
  Top Layer w0.5: v1(44.9,55.9) R29.2@44.9,56.725 ; R9.1@53.38,69.088 54.288,69.088 v1(54.3,69.1) ; C18.2@73.775,86.7 73.775,86.365 C18.2@73.8,86.34
  Layer 1 w0.254: v1@42.142,63.918 v1(42.142,63.921)
  Layer 1 w0.5: v1@42.142,63.918 42.272,63.788 42.272,63.614 43.211,62.675 47.875,62.675 49.3,64.1 ; v1(54.3,69.1) 49.3,64.1 ; v1(78.95,64.1) 49.3,64.1
  Bottom Layer w0.254: C10.2@41.287,61.548 41.587,61.548 C10.2@41.841,61.802 ; v1(42.142,63.921) 42.142,63.29 41.935,63.083 41.935,61.896 C10.2@41.841,61.802 ; v1(44.9,55.9) 44.917,55.917 44.917,59.08 44.423,59.574 44.423,61.654 44.275,61.802 C11.2@43.7,61.802 C10.2@41.841,61.802
  other v1: 79.1,38.3 80.4,38.3 79.05,39.75 80.4,39.75 79.05,41.5 80.4,41.5 79.05,43.25 80.4,43.25 78.95,62.35 80.3,62.35 80.3,64.1 78.95,65.85 80.3,65.85 103.713,82.788 78.4,85.5 79.75,85.5 81.1,85.5 78.4,87.25 79.75,87.25 81.1,87.25 78.4,89 79.75,89
VREF: C7.2 DS1.1 R1.2 R2.2 R3.2 R4.2 R13.2 R14.2 R22.1 R31.1 U1.27 U2.26 X1.P$6 X3.P$2 | length 10.4
  Top Layer w0.254: v1(24.75,65.75) 24.841,65.659 R22.1@25.868,65.659 ; v1(25,69.75) 25.027,69.723 R31.1@26.035,69.723 ; v1(25.42,79) 25.46,78.96 DS1.1@26.67,78.96 26.89,78.74 R13.2@28.306,78.74 ; v1(27.65,74.4) 27.686,74.364 R14.2@27.686,73.279 ; C7.2@33.3,80.15 v1(33.3,81.1) ; v1(35.869,73.674) 37.57,71.973 U2.26@38.271,71.973
VSENA: C33.2 IC1.3 R43.1 R49.1 | length 115.9
  Top Layer w0.254: v1(12.751,64.803) IC1.3@12.751,65.871 ; R43.1@99.1,86.025 R49.1@99.1,85 100.15,85 C33.2@100.4,85.25 100.4,85.225 100.773,84.852 100.798,84.852 100.95,84.7 v1(101.6,84.7)
  Layer 1 w0.254: v1(14,86.75) 76.894,86.707 77.301,86.3 100,86.3 v1(101.6,84.7)
  Bottom Layer w0.254: v1(12.751,64.803) 12.751,71.249 12.726,71.274 12.726,71.526 13.4,72.2 13.4,86.15 v1(14,86.75)
VSENB: C34.2 IC1.5 R44.1 R50.1 | length 93.4
  Top Layer w0.254: IC1.5@15.367,66.249 v1(15.367,64.717) 15.4,64.75 v1@15.45,64.75 ; v1(100.5,63.4) 99.375,63.4 R44.1@99.2,63.225 R50.1@99.2,62.1 100.55,62.1 C34.2@100.7,61.95
  Layer 1 w0.254: v1(15.367,64.717) 17.684,62.4 27.425,62.4 28.842,60.983 50.559,60.983 52.976,63.4 v1(100.5,63.4)
VSENC: C35.2 IC1.10 R45.1 R51.1 | length 111.3
  Top Layer w0.254: IC1.10@15.367,71.673 15.367,73.167 v1(15.5,73.3) ; v1(96,41.1) 96.725,41.1 96.825,41.2 96.8,41.225 96.8,41.1 R51.1@96.8,40.1 C35.2@98.22,40.1
  Layer 1 w0.254: v1(15.475,55) 30.675,55 31.05,54.625 49.875,54.625 51.075,55.825 64.475,55.825 74.983,45.317 80.656,45.317 84.873,41.1 v1(96,41.1)
  Bottom Layer w0.254: v1(15.475,55) 14.725,55.75 14.725,68.75 15.5,69.525 v1(15.5,73.3)
pads on no net: IC1.2 IC1.6 IC1.9 IC1.13 U1.3 U1.4 U1.5 U1.6 U1.7 U1.8 U1.9 U1.11 U1.12 U1.15 U1.16 U1.17 U1.20 U1.21 U1.22 U1.24 U1.25 U1.26 U1.31 U1.32 U1.41 U1.42 U1.47 U1.48 U1.50 U1.51 U1.53 U1.54 U1.61 U1.62 U1.63 U1.64 U1.70 U1.71 U1.75 U1.76 U2.35 U2.36 U2.37 U2.49@39.913,68.243 U2.49@39.913,69.723 U2.49@39.913,71.203 U2.49@41.483,68.243 U2.49@41.483,69.723 U2.49@41.483,71.203 U2.49@43.053,68.243 U2.49@43.053,69.723 U2.49@43.053,71.203 X1.1 X2.1 X3.1
copper on no net: | length 4.6
  Top Layer w0.254: v1(11.5,64.75) 11.557,64.807 11.557,65.105 11.557,66.249 ; v1(11.5,73.25) 11.557,73.193 11.557,72.817 11.557,71.673 ; v1@16.637,64.725 16.637,66.249
  other v1: 16.725,64.725

## Polygon pours and split planes (outlines as drawn)
VREF on Top Layer "Top Layer-VREF" (solid, pour order 40): 7.1,116 7.1,31.877 62.427,31.877 67.225,36.675 67.225,113.225 64.498,115.952
MOTB on Top Layer "Top Layer-MOTB" (solid, pour order 14): 83.028,78.255 81.668,76.895 81.668,61.907 82.049,61.526 85.799,61.526 86.549,62.276 87.549,62.276 89.049,63.776 93.549,63.776 93.799,64.026 102.299,64.026 104.799,66.526 104.799,75.026 101.57,78.255
SPB on Top Layer "Top Layer-SPB" (solid, pour order 46): 71.85,69.05 77.743,69.05 81.35,70.4 81.35,73.05 79.1,75.3 76.6,75.3 76.1,75.8 72.85,75.8 71.85,74.8
DRV_VM on Top Layer "DRV_VM" (solid, remove dead copper, pour order 10): 50.6,72.4 52.5,72.4 52.5,61.3 52.4,61.4 50.6,61.4
SPC on Top Layer "Top Layer-SPC" (solid, pour order 48): 72.15,45.75 78.043,45.75 81.65,47.1 81.65,49.75 79.4,52 76.9,52 76.4,52.5 73.15,52.5 72.15,51.5
MOTA on Top Layer "Top Layer-MOTA" (solid, pour order 12): 82.521,99.171 81.521,98.171 81.521,85.42 83.021,83.921 86.771,83.921 87.521,84.671 88.521,84.671 90.021,86.171 94.521,86.171 94.771,86.421 103.271,86.421 105.771,88.921 105.771,97.421 104.021,99.171
VM on Top Layer "Top Layer - VM" (solid, pour order 54): 74,45.2 74,38.8 76.2,36.6 80.8,36.6 80.8,44.2 79.8,45.2
VM on Top Layer "Top Layer - VM" (solid, pour order 58): 73.5,66.8 73.5,63.1 75.4,61.2 80.8,61.2 80.8,66.6 80.6,66.8
VM on Top Layer "Top Layer - VM" (solid, pour order 60): 73.4,89.5 73.4,85.8 75.3,83.9 80.7,83.9 80.7,89.3 80.5,89.5
MOTC on Top Layer "Top Layer-MOTC" (solid, pour order 42): 90.8,42.5 91.05,42.25 101.45,42.25 105.55,46.35 105.55,56 104.05,57.5 84.05,57.5 82.55,56 82.55,44.5 80.8,42.75 80.8,40 81.7,39.1 84.9,39.1 86.8,41 89.3,41
PGND on Top Layer "PGND" (solid, pour order 50): 68.2,114.9 78.5,114.9 78.5,107.9 75.3,104.7 71.4,104.7 71.4,39 71.2,39.2 67.6,39.2 67.6,114.3
SPA on Top Layer "Top Layer-SPA" (solid, pour order 24): 71.55,92.45 77.443,92.45 81.05,93.8 81.05,96.45 78.8,98.7 76.3,98.7 75.8,99.2 72.55,99.2 71.55,98.2
VBUCK on Top Layer "VBUCK" (solid, pour order 8): 49.2,47.8 52.1,47.8 53.6,49.1 53.6,50 53.6,60.8 49.5,60.8 49.2,60.5
PGND on Bottom Layer "Bottom Layer-PGND" (solid, pour order 20): 76.9,115.55 76.9,115.5 77.7,114.7 77.7,113.8 76.9,32.7 76.2,32.7 69.925,32.7 68.25,34.375 68.25,112.275 71.525,115.55
VM on Bottom Layer "VM" (solid, pour order 52): 80.3,115 78.146,112.846 78.146,37.4 89.7,37.4 89.7,104.1 91.1,105.5 91.1,115
MOTA on Bottom Layer "Bottom Layer-MOTA" (solid, pour order 34): 105.2,99.697 94.7,99.697 92.7,97.697 92.7,86.697 94.2,85.197 104.7,85.197 105.7,86.197 105.7,99.197
MOTB on Bottom Layer "Bottom Layer-MOTB" (solid, pour order 32): 103.9,78.2 93.45,78.2 91.45,76.2 91.45,64.2 92.75,62.9 103.3,62.9 104.75,64.35 104.75,77.35
MOTC on Bottom Layer "Bottom Layer-MOTC" (solid, pour order 30): 105.3,58 93.55,58 92.3,56.75 92.3,46 94.3,44 104.8,44 105.55,44.75 105.55,57.75
no net on Bottom Overlay (solid): 63.729,72.913
MOTC on Layer 1 "Top Layer-MOTC" (solid, pour order 6): 90.7,42.3 90.95,42.05 99.7,42.05 105.45,47.8 105.45,55.8 103.95,57.3 83.95,57.3 82.45,55.8 82.45,44.3 82.525,44.225 86.7,40.8 85.2,39.3 86.7,40.8 89.2,40.8
MOTB on Layer 1 "Top Layer-MOTB" (solid, pour order 26): 83.029,78.2 81.669,76.84 81.669,63.721 91.215,63.715 93.55,63.721 93.8,63.971 102.3,63.971 104.8,66.471 104.8,74.971 101.571,78.2
MOTA on Layer 1 "Top Layer-MOTA" (solid, pour order 28): 82.45,99.2 81.45,98.2 81.45,86.45 103.2,86.45 105.7,88.95 105.7,97.45 103.95,99.2
PGND on Layer 2 "Layer 2-PGND" (solid, pour order 18): 7.112,116 7.112,31.877 106.9,31.877 106.9,116

## Silkscreen, mask and mechanical layers (free items; w line width, h text height)
Bottom Overlay:
  drawing of 2791 lines, arcs and shapes, not listed
  text "Designed by: Michael Reber, Adithya Subbiah, Justin Beemer, and Karthik Ursk" at 105,33.3 h1
Mechanical 2:
  lines w0.254: 7.112,115.987 7.125,116
  lines w0.5: 7.112,115.987 7.112,114.173 7.112,31.877 106.9,31.877 106.9,115.983 ; 7.125,116 106.917,116